# Altium PCB final1.PcbDoc
Units mil, origin at the board's own origin, x right, y up, seen from the top; angles counter-clockwise.
Board outline 6860 x 4805 mil, 2 copper layers (Top Layer, Bottom Layer); 50 components, 42 nets, 170 pads, 7 vias.
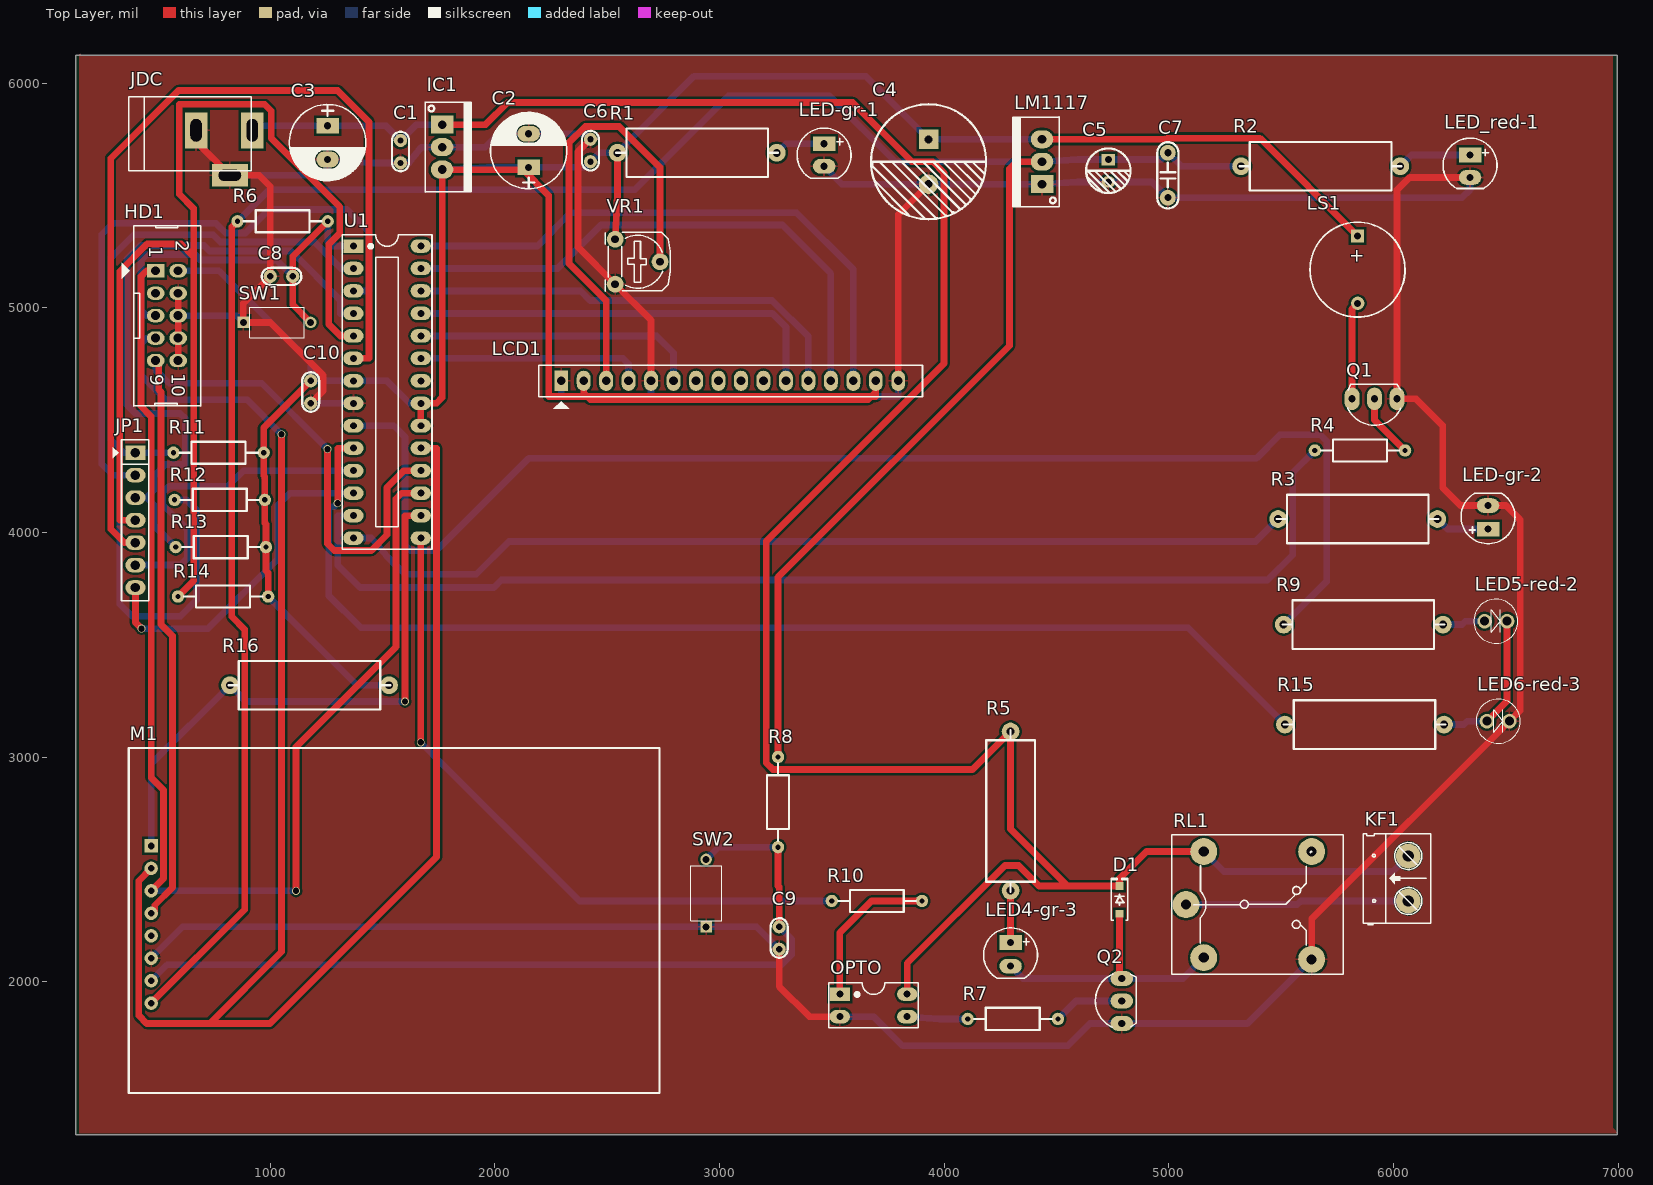
[diagram p0: Top Layer view]
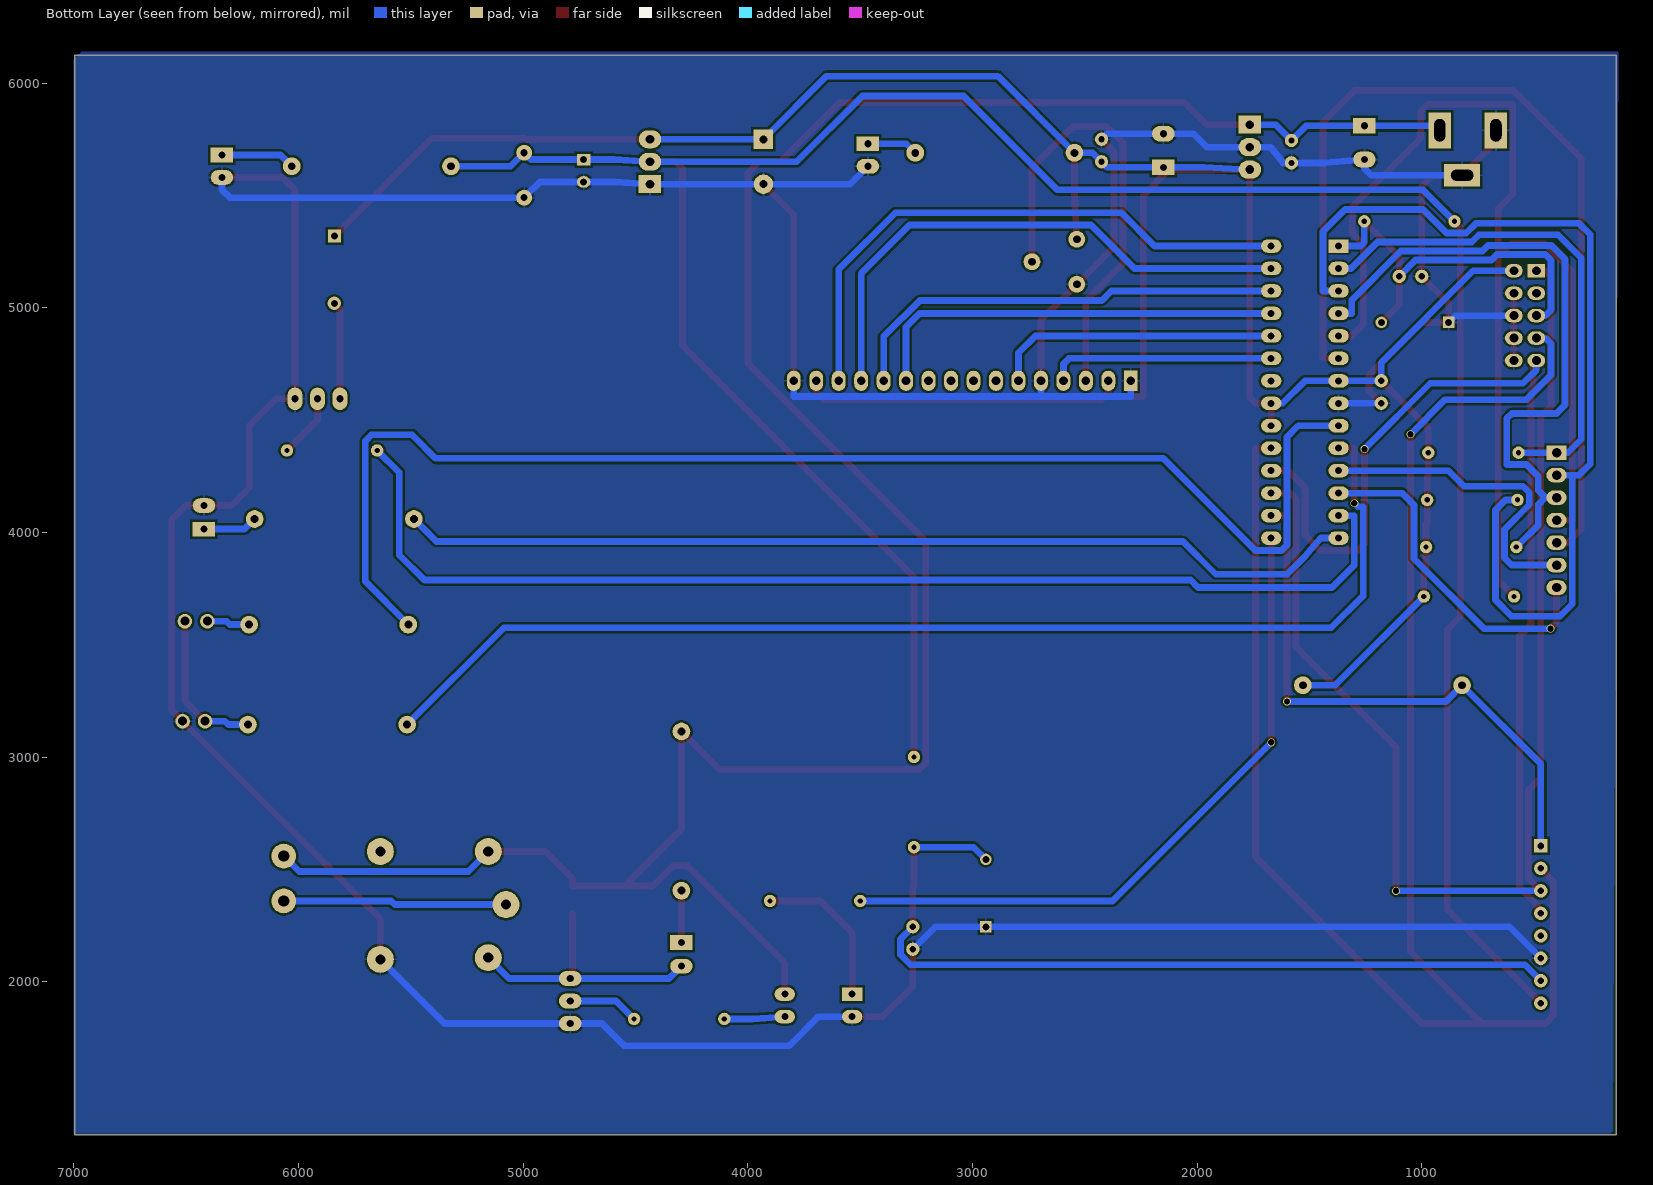
[diagram p1: Bottom Layer view, seen from below]
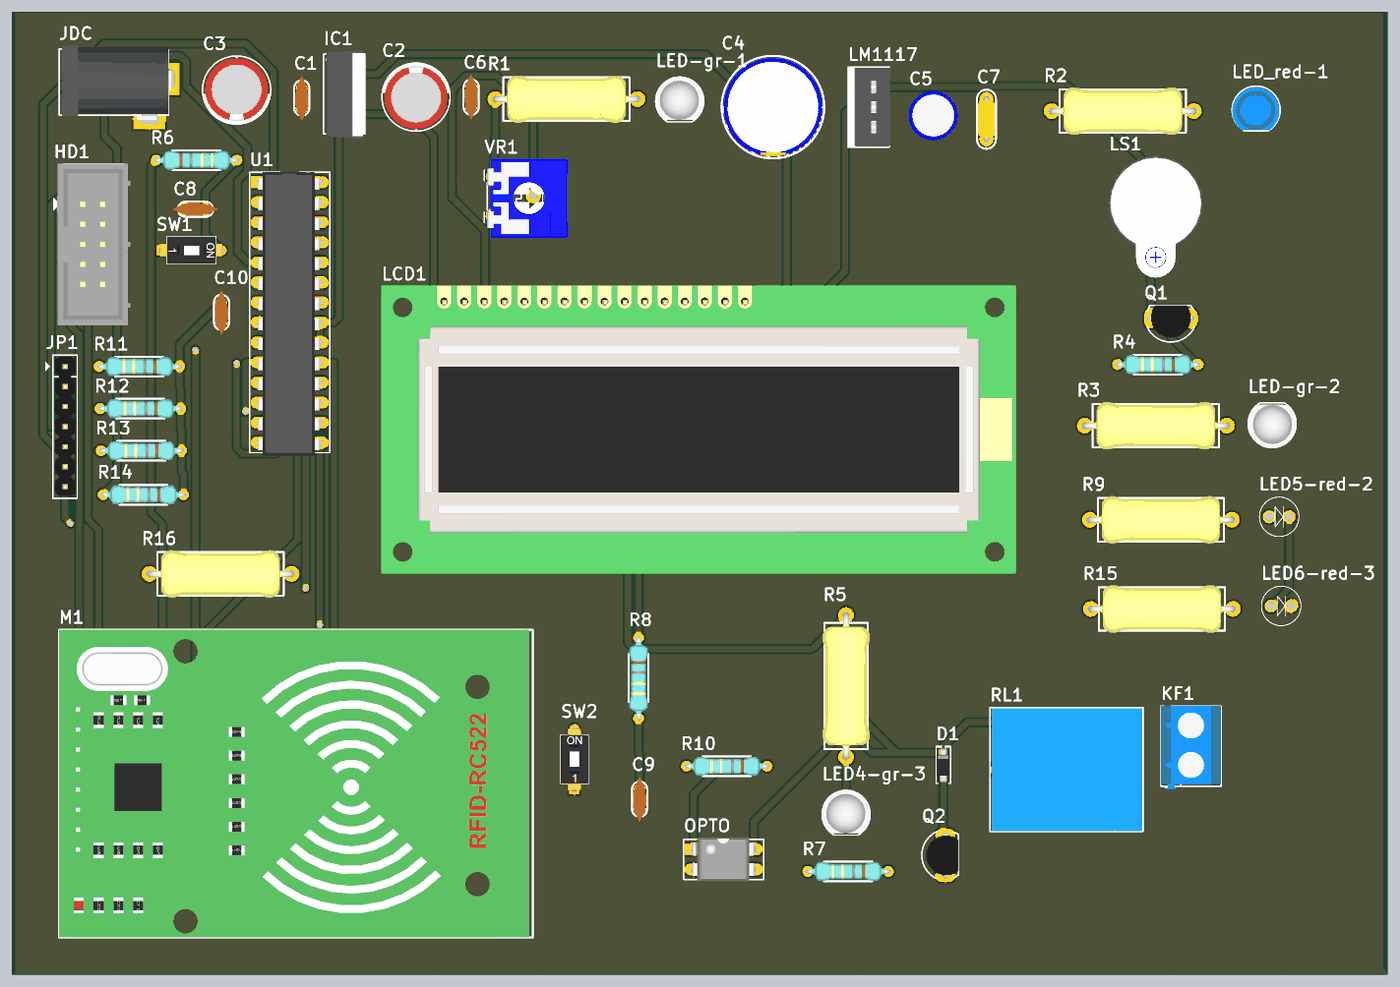
[diagram p2: 3D render of the assembled board from above, using the file's embedded part models]

## Layer stack, top to bottom
Top Solder: solder mask 0.4, Solder Resist, Dk 3.5
Top Layer: signal copper 1.4
Dielectric 1: dielectric 12.6, FR-4, Dk 4.8
Bottom Layer: signal copper 1.4
Bottom Solder: solder mask 0.4, Solder Resist, Dk 3.5

## Board outline
135,1320 6995,1320 6995,6125 135,6125

## Design rules (kind name [scope] priority, off if disabled: settings)
Clearance [All] p1: gap=10 ignorepadtopadclearanceinfootprint=FALSE
PolygonConnect [All] p1: connectstyle=Relief reliefconductorwidth=10 reliefentries=4 polygonreliefangle="90 Angle" airgapwidth=10
RoomDefinition schepc2 [InComponentClass('schepc2')] p1: confinementstyle=ConfineIn formatcopy=TRUE lockcomponents=FALSE outline 8895,1065 25820,1065 25820,4345 8895,4345
RoutingVias [All] p1: holewidth=28 width=35 viastyle="Through Hole" minholewidth=28 minwidth=35 maxholewidth=28 maxwidth=35
SolderMaskExpansion [All] p1: expansion=4 istentingtop=FALSE
Width [All] p1: maxlimit=40 minlimit=20 preferedwidth=30
30 further rules are at their usual default settings.

## Components (designator, comment, footprint, x,y, rotation, side; value= is the part's Value field where it differs from the comment)
C1 "104" "tu gom" 1580,5695 r270 top
C2 "1000uF/16V" CP1.5/3.4 2150,5625 r90 top
C3 "1000uF/16V" CP1.5/3.4 1255,5810 r270 top
C4 "10uF" "tu hoa 13mm" 3930,5650 r270 top
C5 "22uF" "tu hoa 5mm" 4730,5610 r270 top
C6 "104" "tu gom" 2425,5700 r90 top
C7 "100nF" "tu tantalum dip5.08" 4995,5590 r270 top
C8 "22pF" "tu gom" 1050,5140 r180 top
C9 "22pF" "tu gom" 3265,2195 r270 top
C10 "22pF" "tu gom" 1180,4625 r270 top
D1 "S4" "DIODE SOD-123" 4780,2365 r90 top
HD1 "Header 5x2" Hed2X5 490,5165 r270 top
IC1 "LM7805" QTO-220 1765,5815 r270 top
JDC "Jac DC" DC-IN 795,5690 r0 top
JP1 "JP7 PIN" JP7 400,4355 r270 top value=JP7
KF1 "CON 2 KF301" "Con 2 KF301 5.08" 6065,2360 r90 top
LCD1 "LCD1602 XL" "LCD1602 with Jump" 2295,4675 r0 top
LED4-gr-3 "LED" LED-5-Green#1 4295,2170 r270 top value="LED 3 ly Single Colour"
LED5-red-2 "LED" LED-5MM-ORANGE 6405,3605 r0 top value="LED 3 ly Single Colour"
LED6-red-3 "LED" LED-5MM-RED 6415,3160 r0 top value="LED 3 ly Single Colour"
LED-gr-1 "LED" LED-5-Green#2 3465,5730 r270 top value="LED 3 ly Single Colour"
LED-gr-2 "LED" LED-5-Green#1 6420,4020 r90 top value="LED 3 ly Single Colour"
LED_red-1 "LED" LED-5-BLUE 6340,5635 r270 top value="LED 3 ly Single Colour"
LM1117 "LM1117-3.3V" TO220-123 4435,5550 r90 top
LS1 "Coi Chip Speaker" "Coi Chip Speacker" 5839.5,5320 r270 top
M1 "Module RC522" "Module RC522" 370,1505 r0 top
OPTO "OPTO PC817 DIP4" DIP4 3532.48,1945 r270 top value=PC817
Q1 "2N222" TO92-123 5915,4595 r180 top value=C1815
Q2 "2N222" TO92-123 4790,1915 r90 top value=C1815
R1 "150R" "tro vach 1w" 2900,5690 r180 top
R2 "100R" "tro vach 1w" 5675,5630 r180 top
R3 "150R" "tro vach 1w" 5840,4060 r180 top
R4 "15k" "tro vach 1/4w" 5850,4365 r0 top
R5 "820R" "tro vach 1w" 4295,2760 r90 top
R6 "10k" "tro vach 1/4w" 1055,5385 r180 top
R7 "2k" "tro vach 1/4w" 4305,1835 r0 top
R8 "10k" "tro vach 1/4w" 3260,2800 r90 top
R9 "220R" "tro vach 1w" 5865,3590 r0 top
R10 "220R" "tro vach 1/4w" 3700,2360 r0 top
R11 "4k7" "tro vach 1/4w" 770,4355 r0 top
R12 "4k7" "tro vach 1/4w" 775,4145 r0 top
R13 "4k7" "tro vach 1/4w" 780,3935 r0 top
R14 "4k7" "tro vach 1/4w" 790,3715 r0 top
R15 "220R" "tro vach 1w" 5870,3145 r0 top
R16 "4.7k" "tro vach 1w" 1175,3320 r0 top
RL1 "Relay" "Relay 5 Chan SRD" 5075.94,2343.78 r0 top
SW1 "SW" SW-DIP1 1030,4935 r270 top value="SW chip 2 pin"
SW2 "SW" SW-DIP1 2940,2395 r0 top value="SW chip 2 pin"
U1 "ATmega328-PU" DIP28 1370,5275 r270 top
VR1 "10K" VR 2535,5305 r270 top value="VR 10K"

## Footprints (in the part's own frame and the unit in brackets; to place one, negate y for a bottom-side part, rotate by r counter-clockwise, add the part's x,y. Pads: shape width x height; smd on the part's side, far side on the other; paste and mask are expansions set on the pad)
"Coi Chip Speacker" [mm]
  rect 1.5x1.5 hole 0.8: 1(0,0)
  round 1.5 hole 0.8: 2(7.62,0.013)
  silkscreen extent -1.55,-5.38 9.18,5.36, body extent -2.22,-6 13.24,6, height 4.5
"Con 2 KF301 5.08" [mil]
  round 110 hole 50: 1(0,0) 2(200,0)
  silkscreen extent -106,-100 300,200, body extent -115,-100 302,200, height 394
CP1.5/3.4 [mil] "Tu hoa 220->470uF,16V, 470uF/16V,25V"
  rect 70x100 hole 32: 1(0,0)
  oval 70x100 hole 32: 2(150,0)
  silkscreen extent -95,-170 245,170, body extent -85,-157 230,157, height 446
DC-IN [mil] "Jac DC input"
  rect 100x160 hole 50 slot 100 at 90 deg: 1(125,100) 2(-125,100)
  rect 160x100 hole 50 slot 100 at 0 deg: 3(25,-100)
  silkscreen extent -425,-80 120,250, body extent -410,-105 134,269, height 434
"DIODE SOD-123" [mm] "SOD-123"
  rect 0.9x0.95 smd: 1(-1.575,0) 2(1.575,0)
  silkscreen extent -2.3,-0.92 2.41,0.92, body extent -1.86,-0.78 1.86,0.77, height 1.35
DIP4 [mil] "W.300/L.400"
  rect 60x90 hole 31: 1(0,2.52)
  oval 60x90 hole 31: 2(100,2.52) 3(100,302.52) 4(0,302.52)
  silkscreen extent -50,-47 150,353, body extent -59,-7 159,307, height 170
DIP28 [mil] "DIP, 18-Leads, Row Spacing 7.62mm, Pitch 2.54mm, Body 22.8x7.3mm, Window"
  rect 60x90 hole 31: 1(0,0)
  oval 60x90 hole 31: 2(100,0) 3(200,0) 4(300,0) 5(400,0) 6(500,0) 7(600,0) 8(700,0) 9(800,0) 10(900,0) 11(1000,0) 12(1100,0) 13(1200,0) 14(1300,0) 15(1300,300) 16(1200,300) 17(1100,300) 18(1000,300) 19(900,300) 20(800,300) 21(700,300) 22(600,300) 23(500,300) 24(400,300) 25(300,300) 26(200,300) 27(100,300) 28(0,300)
  silkscreen extent -50,-50 1350,350, body extent -50,-10 1367,300, height 200
Hed2X5 [mm] "Header 10x2,20 pin, connecter"
  rect 1.5x2 hole 1: 1(0,0)
  oval 1.5x2 hole 1: 2(0,2.54) 3(2.54,0) 4(2.54,2.54) 5(5.08,0) 6(5.08,2.54) 7(7.62,0) 8(7.62,2.54) 9(10.16,0) 10(10.16,2.54)
  silkscreen extent -5.1,-3.81 15.29,5.11, body extent -5.17,-3.33 15.33,5.97, height 8.82
JP7 [mil] "JP7"
  rect 65x90 hole 42: 1(0,0)
  oval 65x90 hole 42: 2(100,0) 3(200,0) 4(300,0) 5(400,0) 6(500,0) 7(600,0)
  silkscreen extent -57,-100 658,60, body extent -50,-49 646,49, height 323
"LCD1602 with Jump" [mil] "LCD dipslay 16x2, 16 pin"
  rect 62x90 hole 39: 1(0,0)
  oval 62x90 hole 39: 2(100,0) 3(200,0) 4(300,0) 5(400,0) 6(500,0) 7(600,0) 8(700,0) 9(800,0) 10(900,0) 11(1000,0) 12(1100,0) 13(1200,0) 14(1300,0) 15(1400,0) 16(1500,0)
  silkscreen extent -100,-125 1608,70, body extent -320,-1353 2850,84, height 764
LED-5-BLUE [mil] "LED 2 PIN, 5 ly , Only colour, pin to pin 110mil"
  rect 65x100 hole 32: 1(-45,0)
  oval 65x100 hole 32: 2(55,0)
  silkscreen extent -120,-120 104,120, body extent -113,-120 100,117, height 339
LED-5-Green#1 [mil] "LED 2 PIN, 5 ly , Only colour,pin to pin 100mil"
  rect 65x100 hole 32: 1(-5,0)
  oval 65x100 hole 32: 2(100,0)
  silkscreen extent -70,-120 154,120, body extent -69,-120 145,117, height 339
LED-5-Green#2 [mil] "LED 2 PIN, 5 ly , Only colour,pin to pin 100mil"
  rect 65x100 hole 32: 1(0,0)
  oval 65x100 hole 32: 2(100,0)
  silkscreen extent -70,-120 154,120, body extent -69,-120 145,117, height 339
LED-5MM-ORANGE [mil]
  round 65 hole 40: 1(0,0) 2(100,0)
  silkscreen extent -48,-98 148,98, body extent -54,-105 155,105, height 370
LED-5MM-RED [mil]
  round 65 hole 40: 1(0,0) 2(100,0)
  silkscreen extent -48,-98 148,98, body extent -54,-105 155,105, height 370
"Module RC522" [mil]
  rect 60x60 hole 30: 1(100,1100)
  round 60 hole 30: 2(100,1000) 3(100,900) 4(100,800) 5(100,700) 6(100,600) 7(100,500) 8(100,400)
  silkscreen extent 0,0 2362,1535, body extent 0,0 2346,1538, height 487
QTO-220 [mil] "TO-220 - 1-2-3"
  rect 80x100 hole 39: 1(0,0)
  oval 80x100 hole 39: 2(100,0) 3(200,0)
  silkscreen extent -100,-76 300,130, body extent -119,-64 322,121, height 755
"Relay 5 Chan SRD" [mil] "Relay SPDT, 5 pin, 10A,W 650mil, L 800mil, H 800mil"
  round 120 hole 45: 1(0,0) 2(559.06,236.22) 3(559.06,-243.78) 4(78.74,-236.22) 5(78.74,236.22)
  silkscreen extent -63,-311 700,310, body extent -55,-306 697,304, height 602
SW-DIP1 [mm]
  rect 1.3x1.3 hole 0.8: 1(0,-3.81)
  round 1.3 hole 0.8: 2(0,3.81)
  silkscreen extent -1.74,-3.1 1.74,3.1, body extent -1.74,-3.98 1.74,3.89, height 3.95
TO92-123 [mil] "TO-92"
  oval 66x100 hole 32: 1(-100,0) 2(0,0) 3(100,0)
  silkscreen extent -117,-65 120,118, body extent -109,-66 109,95, height 245
TO220-123 [mil] "TO-220 - 1-2-3"
  rect 80x100 hole 39: 1(0,0)
  oval 80x100 hole 39: 2(100,0) 3(200,0)
  silkscreen extent -100,-76 300,130, body extent -95,-80 295,97, height 323
"tro vach 1/4w" [mm]
  round 1.4 hole 0.6: 1(-5.1,0) 2(5.1,0)
  silkscreen extent -4.39,-1.25 4.42,1.25, body extent -5.38,-1.2 5.38,1.2, height 2.41
"tro vach 1w" [mm]
  round 2 hole 0.9: 1(-9,0) 2(9,0)
  silkscreen extent -9.14,-2.75 9.14,2.75, body extent -9.29,-3 9.29,3, height 6.5
"tu gom" [mm] "Tu gom mini"
  round 1.5 hole 0.7: 1(-1.27,0) 2(1.27,0)
  silkscreen extent -2.25,-0.97 2.22,0.97, body extent -2.92,-0.85 2.92,0.85, height 6.12
"tu hoa 5mm" [mm]
  rect 1.3x1.5 hole 0.8: 1(-1.27,0)
  oval 1.3x1.5 hole 0.8: 2(1.27,0)
  silkscreen extent -2.51,-2.51 2.51,2.51, body extent -3.12,-3.18 3.23,3.18, height 14.55
"tu hoa 13mm" [mm]
  rect 2.2x2.2 hole 0.9: 1(-2.54,0)
  round 2.2 hole 0.9: 2(2.54,0)
  silkscreen extent -6.5,-6.5 6.5,6.5, body extent -6.25,-6.25 6.26,6.25, height 23.02
"tu tantalum dip5.08" [mm]
  round 1.8 hole 0.8: 1(-2.54,0) 2(2.54,0)
  silkscreen extent -3.74,-1.2 3.76,1.2, body extent -2.82,-1.08 2.77,1.08, height 6.27
VR [mil] "Resistor Variable"
  round 75 hole 35: 1(0,0) 2(100,200) 3(200,0)
  silkscreen extent -31,-44 231,246, body extent -87,-30 307,372, height 165

## Part data
C1 C6: library part "Tu gom 104 50V", "Cắm", Chung_Loai=Cắm, Don_Vi=Con, Ma_Hang=MH004761, So_Chan=2, Ten_Linh_Kien="Tụ gốm 104 100nF 50V"
C2 C3: library part CP4, "Cap 1000uF/16V - 220uF/50V", Description 1="2200uF-3300uF/6,3V - 1000uF-2200uF/10V", Description 2="1000uF/16V - 470uF => 1000uF/25V - 100uF/100V", Description 3=330uF>470uF/35V_220uF>470uF/50V_10uF>22uF/250V, Description 4="220uF => 330uF/63V - 10uF =>33uF/160 - 200V", Description 5="4,7uF>10uF/250V_3,3uF>10uF/400V - 2,2uF>4,7uF/450V"
C4: library part "Tu Hoa 10uF 450V 13x20", "Cắm", Chung_Loai=Cắm, Don_Vi=Con, Ma_Hang=MH003950, So_Chan=2, Ten_Linh_Kien="Tụ Hóa 10uF 450V 13x20MM"
C5: library part "Tu Hoa 22uF 25V 5x11", "Cắm", Chung_Loai=Cắm, Don_Vi=Con, Ma_Hang=MH006858, So_Chan=2, Ten_Linh_Kien="Tụ Hóa 22uF 25V"
C7: library part "Tu tantalum 100nF 50V 20% DIP5.08", "Cắm", Chung_Loai=Cắm, Don_Vi=Con, Ma_Hang=MH003955, So_Chan=2, Ten_Linh_Kien="Tụ tantalum 104-100nF 50V 20% DIP5.08 (sứ vàng)(10PCS)"
C8 C9 C10: library part "Tu gom 22pF 50V", "Cắm", Chung_Loai=Cắm, Don_Vi=Con, Ma_Hang=MH004771, So_Chan=2, Ten_Linh_Kien="Tụ gốm 22P 50V"
D1: library part "Diode S4", "Dán", Chung_Loai=Dán, Don_Vi=Con, Ma_Hang=MH005519, Ten_Linh_Kien="Diode S4 SOD123 ( 1N5819 SOD123)"
HD1: library part HED5x2
IC1: library part LM78xx, "On ap +, from + 5 to + 24VDC"
JDC: library part DCIN, "Jac DC input"
JP1: library part JP7
KF1: "Cắm", Chung_Loai=Cắm, Don_Vi=Con, Ma_Hang=MH000987, Ten_Linh_Kien="CON 2 KF301-2P 5.08MM Xanh Dương"
LCD1: "LCD 1602 Xanh Lá", CHIP=HD44780, Ma_Hang=67HZ, NCC=NSHOP, Ten="Màn hình LCD 1602 Xanh Lá"
LED4-gr-3 LED5-red-2 LED6-red-3 LED-gr-1 LED-gr-2 LED_red-1: "LED Single colour Green and Red"
LM1117: library part LM1117, "800mA Low-Dropout Linear Regulator", Creator="Nguyen Ba Bien", Website=http://group3i.net
LS1: "Còi chip"
OPTO: "Single Opto"
Q1 Q2: "NPN 600mW, ECB"
R1 R3: library part "Tro Vach 1W 5% 150R", "Cắm", Chung_Loai=Cắm, Don_Vi=Con, Ma_Hang=MH006395, So_Chan=2, Ten_Linh_Kien="Trở 5% 1w 150R"
R2: library part "Tro Vach 1W 5% 100R", "Cắm", Chung_Loai=Cắm, Don_Vi=Con, Ma_Hang=MH006390, So_Chan=2, Ten_Linh_Kien="Trở 5% 1w 100R"
R4: library part "Tro Vach 1/4W 5% 15k", "Cắm", Chung_Loai=Cắm, Don_Vi=Con, Ma_Hang=MH007288, So_Chan=2, Ten_Linh_Kien="Trở Vạch 1/4w 5% 15k"
R5: library part "Tro Vach 1W 5% 820R", "Cắm", Chung_Loai=Cắm, Don_Vi=Con, Ma_Hang=MH006413, So_Chan=2, Ten_Linh_Kien="Trở 5% 1w 820R"
R6: library part "Tro Vach 1/4W 1% 10k", "Cắm", Chung_Loai=Cắm, Don_Vi=Con, Ma_Hang=MH006349, So_Chan=2, Ten_Linh_Kien="Trở Vạch 1/4w 1% 10k"
R7: library part "Tro Vach 1/4W 5% 2k", "Cắm", Chung_Loai=Cắm, Don_Vi=Con, Ma_Hang=MH007305, So_Chan=2, Ten_Linh_Kien="Trở Vạch 1/4w 5% 2k"
R8: library part "Tro Vach 1/4W 5% 10k", "Căm", Chung_Loai=Cắm, Don_Vi=Con, Ma_Hang=MH007354, So_Chan=2, Ten_Linh_Kien="Trở Vạch 1/4w 5% 10K"
R9 R15: library part "Tro Vach 1W 5% 220R", "Cắm", Chung_Loai=Cắm, Don_Vi=Con, Ma_Hang=MH006414, So_Chan=2, Ten_Linh_Kien="Trở 5% 1w 220R"
R10: library part "Tro Vach 1/4W 5% 220R", "Cắm", Chung_Loai=Cắm, Don_Vi=Con, Ma_Hang=MH007300, So_Chan=2, Ten_Linh_Kien="Trở Vạch 1/4w 5% 220R"
R11 R12 R13 R14: library part "Tro Vach 1/4W 5% 470R", "Cắm", Chung_Loai=Cắm, Don_Vi=Con, Ma_Hang=MH007320, So_Chan=2, Ten_Linh_Kien="Trở Vạch 1/4w 5% 470R"
R16: library part "Tro Vach 1W 5% 4.7k", "Cắm", Chung_Loai=Cắm, Don_Vi=Con, Ma_Hang=MH006407, So_Chan=2, Ten_Linh_Kien="Trở 5% 1w 4.7k"
RL1: library part "Relay 5 Chan SRD", "Relay 5 Chan", Ma_Hang=MH009374, Ten="Relay 5V10A SRD-05VDC-SL-C Chính Hãng"
SW1 SW2: library part SW2, "Switch button 2 pin"
U1: "8-bit AVR Microcontroller, 32KB Flash, 1KB EEPROM, 2KB SRAM, 28-pin PDIP, Industrial Grade (-40°C to 85°C)", Supplier Part Number 1=ATMEGA328-PU-ND, ComponentLink1Description="Manufacturer Link", ComponentLink1URL=http://www.atmel.com/products/avr/default.asp?, ComponentLink2Description="ATmega48A/48PA/88A/88PA/168A/168PA/328/328P Datasheet", ComponentLink2URL=http://www.atmel.com/dyn/resources/prod_documents/8271.pdf, ComponentLink3Description="ATmega48A/48PA/88A/88PA/168A/168PA/328/328P Summary", ComponentLink3URL=http://www.atmel.com/dyn/resources/prod_documents/8271S.pdf, ComponentLink4Description="Atmel.com Home", ComponentLink4URL=http://www.atmel.com, DatasheetVersion="revA, Jan-2010", PackageDescription="28-lead (0.300\"/7.62mm Wide) Plastic Dual Inline Package (PDIP)", PackageReference=28P3, PackageVersion="revB, Sep-2001", Published=1-Apr-2010, Publisher="Altium Limited", Supplier 1=Digi-Key, Supplier 2=Mouser, Supplier Part Number 2=556-ATMEGA328-PU
VR1: library part VR1, "Var Resistor"

## Via types
v1: diameter 35, hole 28, Top Layer to Bottom Layer, 7 vias

## Nets (pads, with @x,y where several pads share a name; then routed paths per layer and width w, separated by ;. In a path a pad name is that pad's centre, name@x,y a point inside that pad or via, vN(x,y) a via of type N, cw(c..) or ccw(c..) an arc to the next point about the centre after c; other vN are vias at no path point)
+3.3V: C5.1 C7.1 LM1117.2 M1.8 R2.2 R6.2 R8.2 | length 11745.6
  Top Layer w30: M1.8 886,2321 886,3568 829,3625 829,5359.79 R6.2 ; R8.2 3260,3801 4290,4831 4290,5619 4321,5650 LM1117.2
  Bottom Layer w30: R6.2 994.21,5525 2621,5525 3039,5943 3489,5943 3782,5650 LM1117.2 4593,5660 C5.1 4965,5660 C7.1 5055,5630 R2.2
+5V: C2.1 C4.1 C6.1 C10.1 HD1.2 IC1.3 LCD1.2 LCD1.15 LM1117.3 LS1.1 R1.2 R11.2 R12.2 R13.2 R14.2 R16.2 U1.7 U1.20 U1.21 VR1.1 | length 13599.3
  Top Layer w30: R14.2 990.79,3820 980.79,3830 R13.2 980.79,4037 975.79,4042 R12.2 975.79,4247 970.79,4252 R11.2 970.79,4465.79 C10.1 ; U1.20 U1.21 1740,4575 1765,4600 IC1.3 2124,5615 2239,5500 2239,4605 2411,4605 ; LCD1.2 2395,4621 2411,4605 ; VR1.1 2545.67,5507.67 R1.2 ; LCD1.15 3695,4625 ; LM1117.3 4987,5750 4992,5755 5404.5,5755 LS1.1 ; 2411,4605 3675,4605 ; 2411,4605 2425,4591 3661,4591 3675,4605 ; 3675,4605 3695,4625 ; 3675,4605 3695,4605 3695,4625
  Bottom Layer w30: HD1.2 771,5165 1180,4756 C10.1 U1.7 1520,4675 1620,4575 U1.21 ; R14.2 1385.79,3320 R16.2 ; IC1.3 1968,5625 C2.1 2400,5625 C6.1 2465,5690 R1.2 2886.67,6031 3649,6031 C4.1 LM1117.3
+12V: C1.1 C3.1 D1.2 IC1.1 JDC.1 KF1.2 OPTO.4 R5.2 RL1.5 | length 10975.7
  Top Layer w30: IC1.1 1958,5815 2057,5914 3592,5914 3856,5650 3949,5650 3999,5600 3999,4752 3207,3960 3207,2975 3237,2945 4125.67,2945 R5.2 4295,2680.01 4548,2427.01 ; OPTO.4 3835,2083 4270,2518 4331.01,2518 4422,2427.01 4548,2427.01 ; RL1.5 4900,2580 4780,2460 D1.2 4548,2427.01
  Bottom Layer w30: JDC.1 920,5810 C3.1 1515,5810 C1.1 1650,5815 IC1.1 ; RL1.5 5243.69,2491 5996,2491 KF1.2
BZ: R4.1 U1.13 | length 5148.2
  Bottom Layer w30: U1.13 1300,4075 1300,3855 1400,3755 1995,3755 2028,3788 5439,3788 5551,3900 5551,4266.79 R4.1
C1: JP1.5 U1.6 | length 4239.9
  Top Layer w30: JP1.5 350,3955 290,4015 290,5665 592,5967 1300,5967 1440,5827 1440,4775 U1.6
C2: JP1.6 U1.11 | length 1469.9
  Bottom Layer w30: JP1.6 600,3855 631.77,3886.77 631.77,4013.11 521.65,4123.23 521.65,4177.3 550,4205.65 812.65,4205.65 882,4275 U1.11
C3: JP1.7 U1.12 | length 1527
  Top Layer w30: JP1.7 400,3599 v1(427,3572)
  Bottom Layer w30: v1(427,3572) 723,3572 1034,3883 1034,4122 1087,4175 U1.12
D4: LCD1.11 U1.25 | length 1889.9
  Bottom Layer w30: U1.25 3235,4975 3295,4915 LCD1.11
D5: LCD1.12 U1.26 | length 2006.1
  Bottom Layer w30: U1.26 2382,5075 2424,5033 3234,5033 3395,4872 LCD1.12
D6: LCD1.13 U1.27 | length 2471.4
  Bottom Layer w30: U1.27 2279,5175 2472,5368 3279,5368 3495,5152 LCD1.13
D7: LCD1.14 U1.28 | length 2586.1
  Bottom Layer w30: U1.28 2189,5275 2337,5423 3342,5423 3595,5170 LCD1.14
DS: R3.2 U1.14 | length 4287.8
  Bottom Layer w30: U1.14 1450,3975 1520,3894 1600,3814 1917,3814 2063,3960 5385.67,3960 R3.2
EN: LCD1.6 U1.24 | length 1281.1
  Bottom Layer w30: U1.24 2720,4875 2795,4800 LCD1.6
GND: C1.2 C2.2 C3.2 C4.2 C5.2 C6.2 C7.2 C8.2 C9.2 C10.2 HD1.4 HD1.6 HD1.8 HD1.10 IC1.2 JDC.2 JDC.3 LCD1.1 LCD1.5 LCD1.16 LED6-red-3.2 LED-gr-1.2 LED-gr-2.2 LED_red-1.2 LM1117.1 M1.6 OPTO.2 Q1.1 Q2.1 RL1.3 SW1.1 SW2.1 U1.8 VR1.3 | length 21368.6
  Top Layer w30: HD1.10 HD1.8 HD1.6 HD1.4 ; JDC.2 670,5740 JDC.3 950,5590 1000,5540 C8.2 880,5020 SW1.1 1000,4935 1235,4700 1235,4630 C10.2 ; C6.2 2370,5695 2370,5270 VR1.3 2695,4945 LCD1.5 ; C9.2 3265,1980 3400,1845 OPTO.2 ; LCD1.16 3795,5415 C4.2 ; RL1.3 5635,2280 LED6-red-3.2 6563,3208 6563,4057 6500,4120 LED-gr-2.2 6298,4120 6218,4200 6218,4477 6100,4595 Q1.1 6015,5525 6070,5580 LED_red-1.2
  Bottom Layer w30: M1.6 610,2245 SW2.1 3165,2245 C9.2 ; HD1.6 850,4965 SW1.1 ; JDC.3 1225,5590 1255,5620 C3.2 1432,5645 C1.2 1617,5645 1672,5715 IC1.2 1957,5715 2017,5775 C2.2 2400,5775 C6.2 ; C10.2 U1.8 ; LCD1.1 2295,4605 2695,4605 ; LCD1.5 2695,4605 ; LED-gr-1.2 3545,5550 C4.2 LM1117.1 4593,5560 C5.2 4925,5560 C7.2 6305,5490 6340,5525 LED_red-1.2 ; OPTO.2 3685,1845 3815,1715 4548,1715 4648,1815 Q2.1 5350,1815 RL1.3 ; LCD1.16 3795,4605 2695,4605
H1: JP1.1 R11.1 U1.2 | length 2296.1
  Bottom Layer w30: R11.1 JP1.1 350,4355 290,4415 290,5222 393.29,5325.29 744.78,5325.29 777.62,5292.44 1197.56,5292.44 1315,5175 U1.2
H2: JP1.2 R12.1 U1.3 | length 4323.5
  Bottom Layer w30: JP1.2 330,4255 ; R12.1 626.77,4145 671.77,4100 671.77,3699.05 600,3627.28 384.72,3627.28 330,3682 330,4255 ; U1.3 1440,5075 1440,5339 1341,5438 995,5438 889.44,5332.44 802,5332.44 758.44,5376 300,5376 250,5326 250,4305 300,4255 330,4255
H3: JP1.3 R13.1 U1.4 | length 2926.3
  Bottom Layer w30: JP1.3 450,4155 ; R13.1 481,4033.21 481,4125 450,4155 ; U1.4 1311,4975 1311,5035 1093.56,5252.44 729.34,5252.44 704.78,5277 422,5277 362,5217 362,4568 400,4530 599,4530 622,4507 622,4302.44 533.44,4302.44 481,4250 481,4186 450,4155
H4: JP1.4 R14.1 U1.5 | length 5474.9
  Top Layer w30: JP1.4 330,4055 330,5162 452,5284 604,5284 659,5229 ; R14.1 659,3784.79 659,5229 ; U1.5 1312,4875 1260,4927 1260,5282 1309,5331 1309,5450 1004,5755 1004,5877 975,5906 595,5906 595,5506 659,5442 659,5229
MISO: HD1.9 M1.4 U1.18 | length 4618.7
  Top Layer w30: M1.4 486,2305 486,2341 565,2420 565,3540 514,3591 514,4625 504,4635 504,4765 HD1.9 ; v1(1255,4371) 1255,3950 1285,3920 1450,3920 1520,3990 1520,4200 1595,4275 U1.18
  Bottom Layer w30: HD1.9 490,4724 550,4664 962,4664 v1(1255,4371)
MOSI: HD1.1 M1.3 U1.17 | length 5569.2
  Top Layer w30: M1.3 525,2460 525,2854 470,2909 470,4517 425,4562 425,5140 450,5165 HD1.1 ; v1(1115,2405) 1115,3046 1560,3491 1560,4150 1585,4175 U1.17
  Bottom Layer w30: M1.3 v1(1115,2405)
NetD1_1: D1.1 LED4-gr-3.2 Q2.3 RL1.4 | length 1218.8
  Top Layer w30: D1.1 4780,2015 Q2.3
  Bottom Layer w30: LED4-gr-3.2 4350,2015 Q2.3 5062.13,2015 RL1.4
NetLCD1_3: LCD1.3 VR1.2 | length 2058.6
  Top Layer w30: LCD1.3 2495,5032 2330,5197 2330,5735 2402,5807 2553,5807 2735,5625 VR1.2
NetLED4-gr-3_1: LED4-gr-3.1 R5.1 | length 230.7
  Top Layer w30: LED4-gr-3.1 R5.1
NetLED5-red-2_1: LED5-red-2.1 R9.2 | length 191.9
  Bottom Layer w30: R9.2 6304,3590 6319,3605 LED5-red-2.1
NetLED5-red-2_2: LED5-red-2.2 LED6-red-3.1 R15.2 | length 679.2
  Top Layer w30: LED6-red-3.1 6505,3250 LED5-red-2.2
  Bottom Layer w30: R15.2 6312,3145 6327,3160 LED6-red-3.1
NetLED-gr-1_1: LED-gr-1.1 R1.1 | length 227.2
  Bottom Layer w30: R1.1 3294.33,5730 LED-gr-1.1
NetLED-gr-2_1: LED-gr-2.1 R3.1 | length 244.3
  Bottom Layer w30: R3.1 6239.33,4015 LED-gr-2.1
NetLED_red-1_1: LED_red-1.1 R2.1 | length 331.4
  Bottom Layer w30: R2.1 6079.33,5680 LED_red-1.1
NetLS1_2: LS1.2 Q1.3 | length 435.4
  Top Layer w30: Q1.3 5815,4995 LS1.2
NetOPTO_1: OPTO.1 R10.2 | length 698.2
  Top Layer w30: OPTO.1 3535,2219 3676,2360 R10.2
NetOPTO_3: OPTO.3 R7.1 | length 269.6
  Bottom Layer w30: OPTO.3 3979,1835 R7.1
NetQ1_2: Q1.2 R4.2 | length 286.2
  Top Layer w30: Q1.2 5915,4500.79 R4.2
NetQ2_2: Q2.2 R7.2 | length 317.3
  Bottom Layer w30: R7.2 4585.79,1915 Q2.2
RELAY: R10.1 U1.15 | length 3030.6
  Top Layer w30: v1(1670,3066) U1.15
  Bottom Layer w30: v1(1670,3066) 2376,2360 R10.1
RS: LCD1.4 U1.23 | length 1010.4
  Bottom Layer w30: U1.23 2570,4775 2595,4750 LCD1.4
RSet: C8.1 HD1.5 R6.1 SW1.2 U1.1 | length 1785.3
  Top Layer w30: SW1.2 1100,5015 C8.1 1100,5229.21 R6.1
  Bottom Layer w30: HD1.5 450,4965 425,4990 425,5212 450,5237 664.78,5237 689.34,5212.44 1027.56,5212.44 C8.1 ; R6.1 1255.79,5291.21 1272,5275 U1.1
RSet-RC522: C9.1 M1.7 R8.1 SW2.2 | length 3743.6
  Top Layer w30: R8.1 3260,2427 3265,2422 C9.1
  Bottom Layer w30: M1.7 541,2076 3275,2076 3320,2121 3320,2190 C9.1 ; SW2.2 2994.21,2599.21 R8.1
SCK: HD1.7 M1.2 U1.19 | length 7916.6
  Top Layer w30: M1.2 415,2450 415,1850 450,1815 731,1815 ; v1(1050,4437) 1050,2134 731,1815 ; U1.19 1740,4375 1740,2556 999,1815 731,1815
  Bottom Layer w30: HD1.7 450,4865 425,4840 425,4700 534,4591 896,4591 v1(1050,4437)
SS: M1.1 R16.1 U1.16 | length 2566.4
  Top Layer w30: v1(1600,3248) 1600,4075 U1.16
  Bottom Layer w30: M1.1 470,2969.33 R16.1 892.67,3248 v1(1600,3248)
SSK: R15.1 U1.10 | length 5250.1
  Top Layer w30: v1(1300,4130) 1300,4375 U1.10
  Bottom Layer w30: v1(1300,4130) 1285,4115 1260,4115 1260,3720 1404,3576 5084.67,3576 R15.1
SSS: R9.1 U1.9 | length 5964.8
  Bottom Layer w30: U1.9 1550,4475 1600,4425 1600,3945 1625,3920 1740,3920 2150,4330 5389,4330 5494,4435 5675,4435 5702,4408 5702,3781.33 R9.1
TB-: KF1.1 RL1.1 | length 995.8
  Bottom Layer w30: RL1.1 5571,2343.78 5587.22,2360 KF1.1
pads on no net: HD1.3 LCD1.7 LCD1.8 LCD1.9 LCD1.10 M1.5 RL1.2 U1.22

## Polygon pours and split planes (outlines as drawn)
GND on Top Layer "GND_L01_P000" (solid, pour order 0): 150,6135 165,6120 6975,6120 6975,1350 7000,1325 150,1325
GND on Bottom Layer "GND_L02_P001" (solid, pour order 1): 125,6140 6965,6140 7000,6105 7000,1325 160,1325 150,1335

## Silkscreen, mask and mechanical layers (free items; w line width, h text height)
Mechanical 1:
  the board outline again, w49

## Text inside footprints (layer, text, board x,y; h text height)
HD1: Top Overlay "1" at 460.47,5274.25 h60 r270; Top Overlay "2" at 580,5300 h60 r270; Top Overlay "9" at 466,4704 h60 r270; Top Overlay "10" at 561,4709 h60 r270
LS1: Top Overlay "+" at 5811.5,5264.5 h60 r270